# Altium PCB SF16_POWER.PcbDoc
Units mm, origin at the board's own origin, x right, y up, seen from the top; angles counter-clockwise.
Board outline 135 x 75 mm, 2 copper layers (Top Layer, Bottom Layer); 87 components, 63 nets, 272 pads, 0 vias.
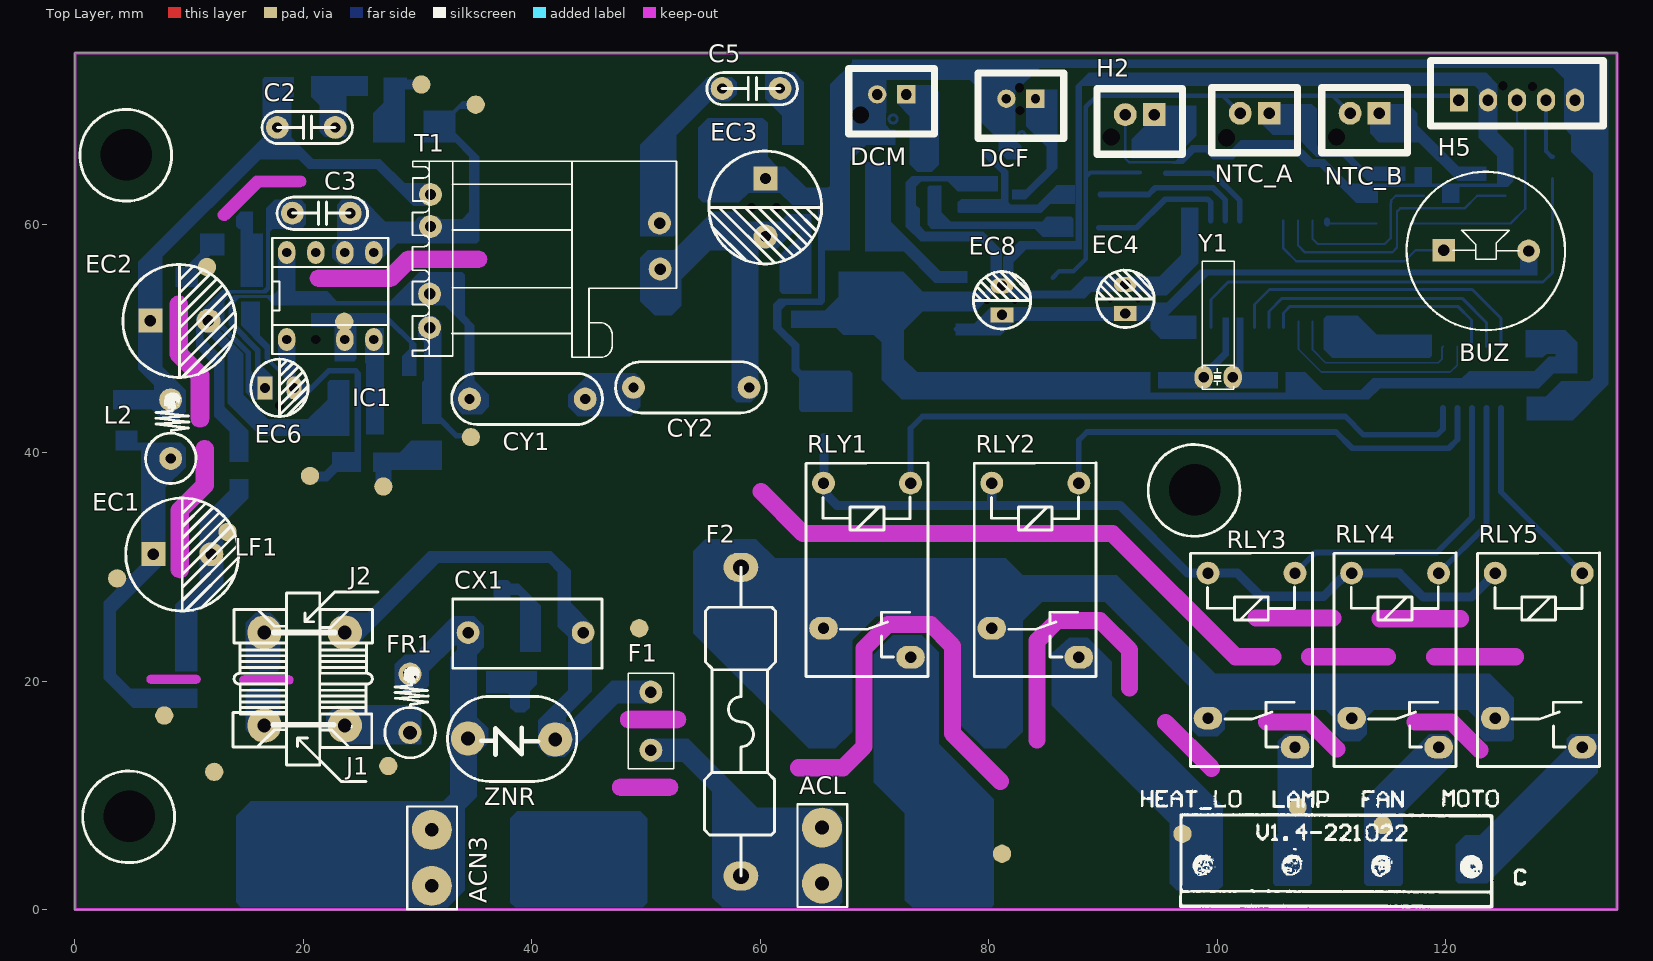
[diagram p0: Top Layer view]
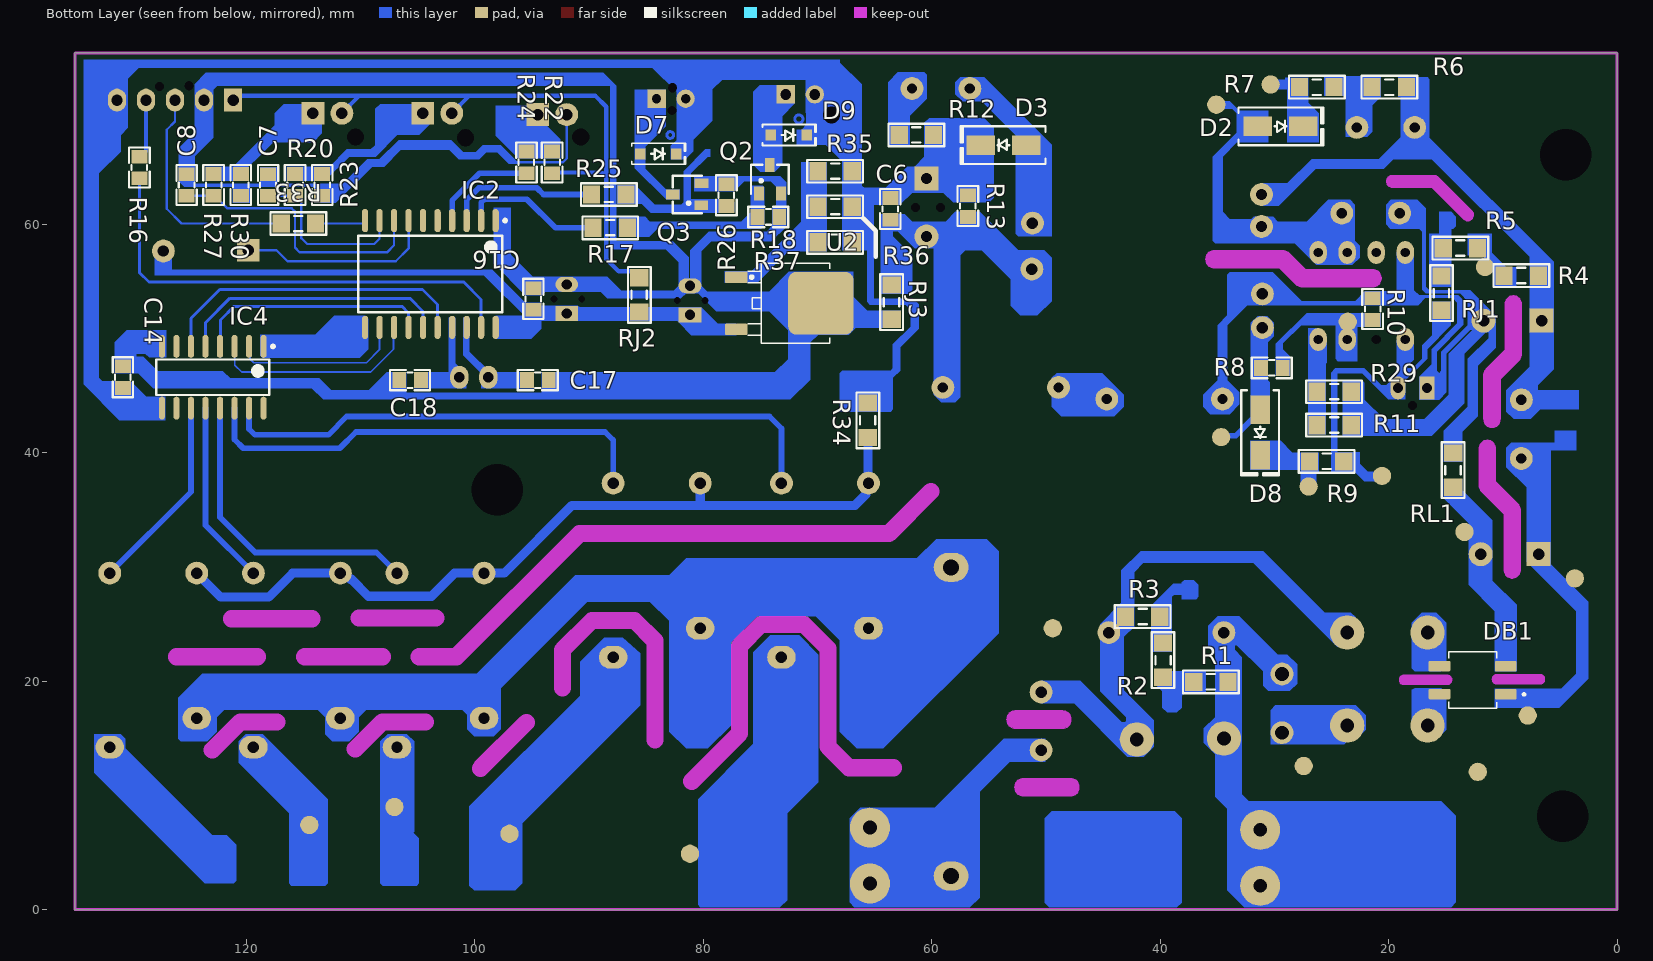
[diagram p1: Bottom Layer view, seen from below]
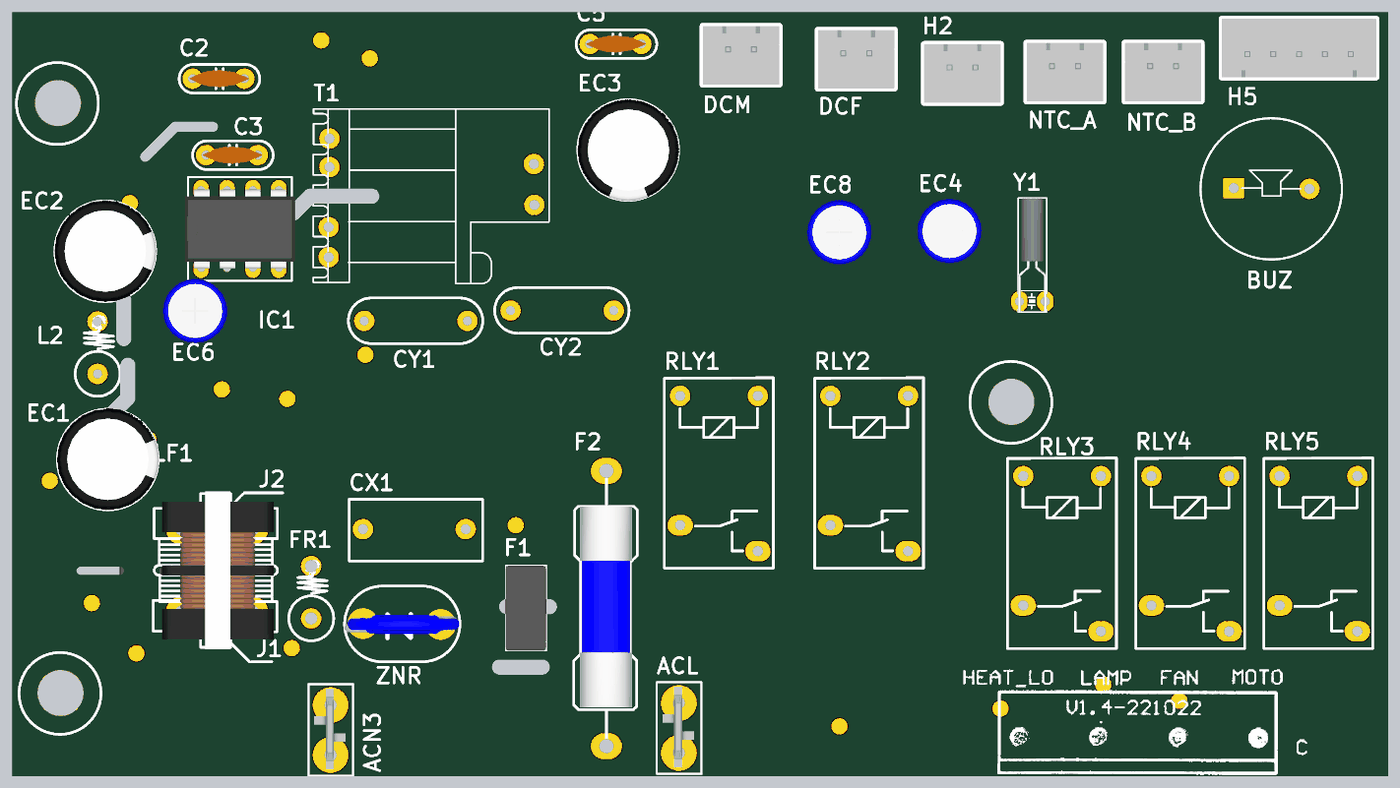
[diagram p2: 3D render of the assembled board from above, using the file's embedded part models]
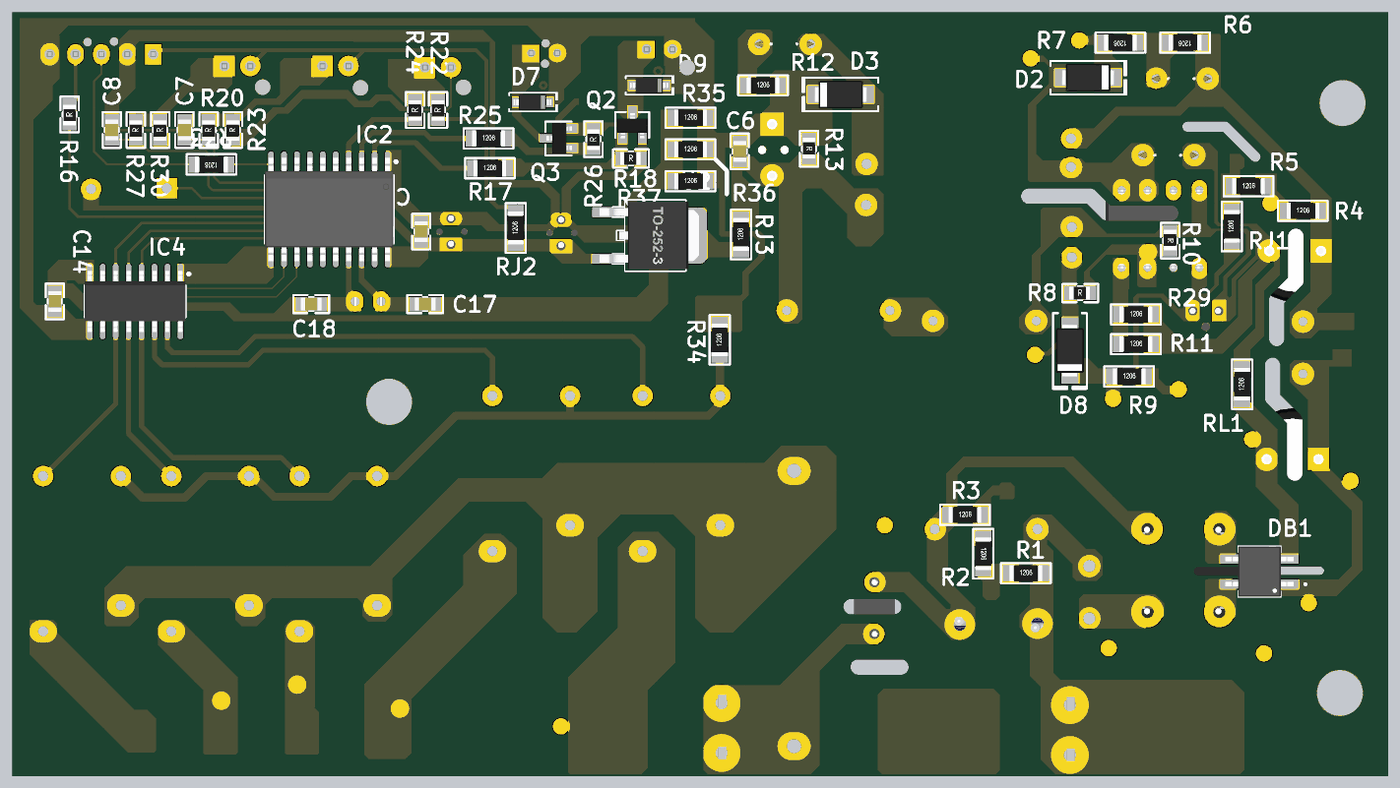
[diagram p3: 3D render of the assembled board from below, using the file's embedded part models]

## Layer stack, top to bottom
Top Solder: solder mask 0.0102, Solder Resist, Dk 3.5
Top Layer: signal copper 0.0356
Dielectric 1: dielectric 0.32, FR-4, Dk 4.8
Bottom Layer: signal copper 0.0356
Bottom Solder: solder mask 0.0102, Solder Resist, Dk 3.5

## Board outline
0,0 0,75 135,75 135,0
cut-out: 21.358,54.53 cw(c21.358,55.28) 21.358,56.031 27.272,56.031 28.713,57.471 cw(c29.243,56.941) 29.243,57.691 35.283,57.691 cw(c35.283,56.941) 36.033,56.941 cw(c35.283,56.941) 35.283,56.19 29.554,56.19 28.113,54.749 28.114,54.75 cw(c27.583,55.28) 27.583,54.53
cut-out: 8.433,29.769 8.433,34.969 cw(c9.183,34.969) 8.652,35.5 8.652,35.499 10.608,37.455 10.608,40.344 cw(c11.358,40.344) 12.108,40.344 12.108,37.144 cw(c11.358,37.144) 11.889,36.613 11.889,36.614 9.933,34.658 9.933,29.769 cw(c9.183,29.769)
cut-out: 14.833,19.718 cw(c14.833,20.118) 14.833,20.519 18.683,20.519 cw(c18.683,20.118) 19.083,20.118 cw(c18.683,20.118) 18.683,19.718
cut-out: 6.708,19.769 cw(c6.708,20.169) 6.708,20.569 10.558,20.569 cw(c10.558,20.169) 10.958,20.169 cw(c10.558,20.169) 10.558,19.769
cut-out: 10.201,46.465 8.552,48.114 8.552,48.113 cw(c9.083,48.644) 8.333,48.644 8.333,52.994 cw(c9.083,52.994) 9.833,52.994 9.833,48.955 11.482,47.306 cw(c10.952,46.775) 11.702,46.775 11.702,42.964 cw(c10.952,42.964) 10.201,42.964
cut-out: 13.4,60.452 cw(c13.046,60.806) 12.692,61.16 15.641,64.108 15.64,64.107 cw(c15.994,63.754) 15.994,64.254 19.708,64.254 cw(c19.708,63.754) 20.208,63.754 cw(c19.708,63.754) 19.708,63.253 16.201,63.253
cut-out: 47.808,9.969 cw(c47.808,10.719) 47.808,11.469 52.008,11.469 cw(c52.008,10.719) 52.758,10.719 cw(c52.008,10.719) 52.008,9.969
cut-out: 48.508,15.894 cw(c48.508,16.644) 48.508,17.394 52.708,17.394 cw(c52.708,16.644) 53.458,16.644 cw(c52.708,16.644) 52.708,15.894

## Design rules (kind name [scope] priority, off if disabled: settings)
Clearance Clearance_1 [OnLayer('Bottom Layer') vs OnLayer('Keep-Out Layer')] p1: gap=0 ignorepadtopadclearanceinfootprint=FALSE
Clearance [All] p2: gap=0.1 ignorepadtopadclearanceinfootprint=FALSE
ComponentClearance [InComponent('T2') vs InComponent('CY2')] p1: gap=0 collisioncheckmode=3 verticalgap=0 showdistances=FALSE
PolygonConnect [All] p1: connectstyle=Relief reliefconductorwidth=0.254 reliefentries=4 polygonreliefangle="90 Angle" airgapwidth=0.254
RoutingVias [All] p1: holewidth=0.711 width=1.27 viastyle="Through Hole" minholewidth=0.711 minwidth=1.27 maxholewidth=0.711 maxwidth=1.27
SolderMaskExpansion [All] p1: expansion=0.102 istentingtop=FALSE
Width [All] p1: maxlimit=0.8 minlimit=0.152 preferedwidth=0.5
29 further rules are at their usual default settings.

## Components (designator, comment, footprint, x,y, rotation, side; value= is the part's Value field where it differs from the comment)
ACL "1217861-1" CON1_P192_70D137_TH_ST 65.405,7.186 r0 top
ACN3 "1217861-1" CON1_P192_70D137_TH_ST 31.242,6.985 r0 top
BUZ "Coi Chip Speaker" "Coi 14mm" 118.429,71.408 r0 top
C2 "102/1KV" "TU GOM CAO AP" 20.347,65.363 r180 top
C3 "22/1KV" "TU GOM CAO AP" 21.664,57.857 r180 top
C5 "102/1KV" "TU GOM CAO AP" 59.291,68.763 r180 top
C6 "10pF" "tu 0805" 63.627,61.341 r90 bottom
C7 "10pF" "Tu 0805" 118.09,63.443 r270 bottom
C8 "10pF" "Tu 0805" 125.222,63.443 r270 bottom
C14 "10pF" "Tu 0805" 130.81,46.609 r90 bottom
C16 "10pF" "tu 0805" 94.869,53.467 r270 bottom
C17 "10pF" "tu 0805" 94.488,46.355 r180 bottom
C18 "10pF" "tu 0805" 105.664,46.355 r180 bottom
CX1 "0.1" "TU VUONG 10MM" 44.492,28.067 r180 top
CY1 "222M" "TU GOM CAO AP 222M" 39.544,37.329 r180 top
CY2 "222M" "TU GOM CAO AP 222M" 53.895,38.345 r180 top
D2 "M7" "DIODE SMA" 29.464,68.58 r180 bottom
D3 "SS510" "DIODE SMA" 53.721,66.929 r0 bottom
D7 "T4" "DIODE SOD-123" 83.947,66.167 r180 bottom
D8 "RS1M" "DIODE SMA" 31.242,41.783 r270 bottom
D9 "T4" "DIODE SOD-123" 72.517,67.818 r180 bottom
DB1 "MLB10S" MBLS-1 12.446,20.32 r0 bottom
DCF "Header 2P 2.54 Duc Thang" XH2.54M-2#1 84.074,70.993 r180 top
DCM "Header 2P 2.54 Duc Thang" XH2.54M-2#2 72.771,71.374 r180 top
EC1 "10UF/400V" "tu hoa 10mm" 9.398,31.115 r0 top
EC2 "10UF/400V" "tu hoa 10mm" 9.144,51.562 r0 top
EC3 "680uF/25V" "tu hoa 10mm" 60.452,61.468 r270 top
EC4 "100uF/16V" "tu hoa 5mm" 91.948,53.467 r90 top
EC6 "47uF/50V" "tu hoa 5mm" 17.907,45.677 r0 top
EC8 "100uF/16V" "tu hoa 5mm" 81.153,53.34 r90 top
F1 "2A 250VAC" "Cau chi 2A 250V T2A250V" 52.705,12.065 r90 top
F2 "3.15A/250VAC" "Cau Chi 250V" 48.597,15.425 r90 top (schematic designator F1)
FR1 "1.5R" "TRO CAU CHI DUNG" 29.337,15.494 r0 top
H2 "Header 2P 2.54 Duc Thang" XH2.54M-2#3 94.488,69.596 r180 top
H5 "Header 5P 2.54 DT" XH2.54M-5 121.159,70.872 r0 top
IC1 "MH002775" DIP8 22.352,53.721 r0 top
IC2 "74HC245 SMD" "SOP 20" 103.886,55.65 r270 bottom
IC4 "ULN2003" "SOP 16" 122.936,46.609 r270 bottom
L2 "100uH 3A" "CUON CAM - duplicate" -0.383,41.458 r0 top
LF1 "47uH SMD" "CUON CAM AC-AC" 20.066,20.193 r0 top
NTC_A "Header 2P 2.54 Duc Thang" XH2.54M-2#3 104.549,69.723 r180 top
NTC_B "Header 2P 2.54 Duc Thang" XH2.54M-2#3 114.173,69.723 r180 top
Q2 "HF" SOT-23 74.168,63.938 r180 bottom value=C9014
Q3 "HF" SOT-23 81.407,62.611 r90 bottom value=C9014
R1 "0.68R" "tro smd 1206" 35.56,19.939 r180 bottom
R2 "0.68R" "tro smd 1206" 39.751,21.844 r270 bottom
R3 "0.68R" "tro smd 1206" 41.529,25.654 r180 bottom
R4 "0.68R" "tro smd 1206" 8.382,55.499 r180 bottom
R5 "0.68R" "tro smd 1206" 13.716,57.912 r180 bottom
R6 "0.68R" "tro smd 1206" 19.939,72.009 r0 bottom
R7 "0.68R" "tro smd 1206" 26.289,72.009 r0 bottom
R8 "0.22R" "tro smd 0805" 30.226,47.498 r180 bottom
R9 "0.68R" "tro smd 1206" 25.424,39.243 r180 bottom
R10 "0.22R" "tro smd 0805" 21.336,52.578 r270 bottom
R11 "0.68R" "tro smd 1206" 24.765,42.418 r180 bottom
R12 "0.68R" "tro smd 1206" 61.341,67.818 r180 bottom
R13 "0.22R" "tro smd 0805" 56.769,61.595 r270 bottom
R16 "0.22R" "tro smd 0805" 129.426,64.966 r90 bottom
R17 "0.68R" "tro smd 1206" 88.138,59.69 r180 bottom
R18 "0.22R" "tro smd 0805" 74.295,60.706 r180 bottom
R20 "0.22R" "tro smd 0805" 115.788,63.441 r90 bottom
R22 "0.22R" "tro smd 0805" 93.285,65.417 r90 bottom
R23 "0.22R" "tro smd 0805" 113.411,63.441 r90 bottom
R24 "0.22R" "tro smd 0805" 95.54,65.417 r90 bottom
R25 "0.68R" "tro smd 1206" 88.265,62.611 r180 bottom
R26 "0.22R" "tro smd 0805" 78.039,62.541 r90 bottom
R27 "0.22R" "tro smd 0805" 122.921,63.441 r90 bottom
R29 "0.68R" "tro smd 1206" 24.765,45.339 r180 bottom
R30 "0.22R" "tro smd 0805" 120.543,63.441 r90 bottom
R33 "0.68R" "Tro SMD 1206" 115.443,60.071 r0 bottom
R34 "0.68R" "tro smd 1206" 65.59,42.842 r90 bottom
R35 "0.68R" "tro smd 1206" 68.453,64.643 r180 bottom
R36 "0.68R" "tro smd 1206" 68.453,61.531 r180 bottom
R37 "0.68R" "tro smd 1206" 68.453,58.42 r180 bottom
RJ1 "0.68R" "tro smd 1206" 15.367,53.975 r90 bottom
RJ2 "0.68R" "tro smd 1206" 85.593,53.823 r90 bottom
RJ3 "0.68R" "tro smd 1206" 63.5,53.189 r90 bottom
RL1 "0.68R" "tro smd 1206" 14.351,38.481 r90 bottom
RLY1 "Relay JZC-8F-1H" "Relay 4 chan JZC-8F" 63.992,39.068 r270 top
RLY2 "Relay JZC-8F-1H" "Relay 4 chan JZC-8F" 78.724,39.068 r270 top
RLY3 "Relay JZC-8F-1H" "Relay 4 chan JZC-8F" 97.647,31.194 r270 top
RLY4 "Relay JZC-8F-1H" "Relay 4 chan JZC-8F" 110.22,31.194 r270 top
RLY5 "Relay JZC-8F-1H" "Relay 4 chan JZC-8F" 122.793,31.194 r270 top
T1 "Bien ap" "BIEN AP EE1610-12V1.1A" 38.354,57.404 r0 top
U2 "78M05 SMD TO252" TO252 73.406,53.086 r270 bottom
Y1 "16Mhz" "Thach Anh 2 Chan 32,768 KHz" 98.806,46.609 r90 top value=4Mhz
ZNR "MOV-07D471KTR" "Tu MOV - duplicate" 32.596,11.233 r0 top value=126pF

## Footprints (in the part's own frame and the unit in brackets; to place one, negate y for a bottom-side part, rotate by r counter-clockwise, add the part's x,y. Pads: shape width x height; smd on the part's side, far side on the other; paste and mask are expansions set on the pad)
"BIEN AP EE1610-12V1.1A" [mm]
  round 2 hole 1: 1(-7.225,5.2) 2(-7.225,2.4) 3(-7.3,-3.5) 4(-7.3,-6.45) 5(12.825,2.7) 6(12.875,-1.325)
  silkscreen extent -8.81,-9.05 14.3,8.11
"Cau chi 2A 250V T2A250V" [mm]
  round 2 hole 1: 1(1.905,2.286) 2(6.985,2.286)
  silkscreen extent 0.27,0.29 8.62,4.29, body extent 0.27,0.32 8.62,4.32, height 8.1
"Cau Chi 250V" [mm] "De Fuse"
  oval 2.54x3.048 hole 1.4: 1(-12.475,-9.7) 2(14.55,-9.7)
  silkscreen extent -12.47,-12.73 14.55,-6.51, body extent -8.64,-12.2 11.06,-7.1, height 9.41
"Coi 14mm" [mm]
  rect 2x2 hole 1: 1(1.4,-13.675)
  round 2 hole 1: 2(8.825,-13.75)
  silkscreen extent -1.86,-20.68 12.01,-6.81
CON1_P192_70D137_TH_ST [mm] "SOLDER TABS"
  round 3.5 hole 1.2: 1(0,-4.9) 1(0,0)
  silkscreen extent -2.16,-6.95 2.21,2.05, body extent -1.62,-6.31 1.47,1.61, height 10.48
"CUON CAM - duplicate" [mm] "Dang cam giong tro"
  round 2 hole 0.9: 1(8.765,-1.961) 2(8.763,3.175)
  silkscreen extent 6.57,-4.16 10.98,3.81, body extent 6.87,-3.51 10.67,1.23, height 13.57
"CUON CAM AC-AC" [mm] "Cuon Cam 4.5x5"
  round 3 hole 1.2: 1(3.556,4.064) 2(-3.48,4.064) 3(3.556,-4.064) 4(-3.48,-4.064)
  silkscreen extent -6.22,-8.96 6.48,7.62, body extent -5.39,-7.75 5.61,7.75, height 16.77
"DIODE SMA" [mm] "SMA"
  rect 2.5x1.7 smd: 1(-2,0) 2(2,0)
  silkscreen extent -3.68,-1.65 3.75,1.65, body extent -2.6,-1.37 2.6,1.37, height 2.4
"DIODE SOD-123" [mm] "SOD-123"
  rect 0.9x0.95 smd: 1(-1.575,0) 2(1.575,0)
  silkscreen extent -2.3,-0.92 2.41,0.92, body extent -1.86,-0.78 1.86,0.77, height 1.35
DIP8 [mm] "W.300/L.400"
  oval 1.5x2 hole 0.8: 1(-3.81,-3.81) 3(1.27,-3.81) 4(3.81,-3.81) 5(3.81,3.81) 6(1.27,3.81) 7(-1.27,3.81) 8(-3.81,3.81)
  round 0 hole 0.8: 2(-1.27,-3.81)
  silkscreen extent -5.08,-5.08 5.08,5.08, body extent -5.4,-3.88 5.4,3.88, height 4.5
MBLS-1 [mm]
  rrect23% 1.91x0.91 smd: 1(-2.7,1.45) 2(-2.7,-1) 3(3.1,-1) 4(3.1,1.45)
  silkscreen extent -4.4,-2.26 2.3,2.7, body extent -3.15,-2.26 3.55,2.7, height 2.7
"Relay 4 chan JZC-8F" [mm]
  round 2 hole 1: 1(1.73,1.54) 2(1.73,9.16)
  oval 2x2.5 hole 1: 3(16.97,9.16) 4(14.43,1.54)
  silkscreen extent -0.05,0 18.65,10.68, body extent 0.25,0.25 18.45,10.45, height 15.5
"SOP 16" [mm] "SOIC, 16-Leads, Body 9.90x3.91mm, Pitch 1.27mm, IPC Medium Density"
  oval 2x0.55 smd: 1(-2.7,4.445) 2(-2.7,3.175) 3(-2.7,1.905) 4(-2.7,0.635) 5(-2.7,-0.635) 6(-2.7,-1.905) 7(-2.7,-3.175) 8(-2.7,-4.445) 9(2.7,-4.445) 10(2.7,-3.175) 11(2.7,-1.905) 12(2.7,-0.635) 13(2.7,0.635) 14(2.7,1.905) 15(2.7,3.175) 16(2.7,4.445)
  silkscreen extent -2.82,-4.95 1.55,5.39, body extent -3,-4.95 3,4.95, height 1.4
"SOP 20" [mm] "SOIC, 20-Leads, Body 12.60x7.50mm, Pitch 1.27mm, IPC Medium Density"
  oval 2.032x0.55 smd: 1(-4.675,5.715) 2(-4.675,4.445) 3(-4.675,3.175) 4(-4.675,1.905) 5(-4.675,0.635) 6(-4.675,-0.635) 7(-4.675,-1.905) 8(-4.675,-3.175) 9(-4.675,-4.445) 10(-4.675,-5.715) 11(4.675,-5.715) 12(4.675,-4.445) 13(4.675,-3.175) 14(4.675,-1.905) 15(4.675,-0.635) 16(4.675,0.635) 17(4.675,1.905) 18(4.675,3.175) 19(4.675,4.445) 20(4.675,5.715)
  silkscreen extent -4.8,-6.3 3.35,6.66, body extent -5.07,-6.3 5.07,6.3, height 2.25
SOT-23 [mm] "SOT 23 _ 1-3-2"
  rect 0.85x1.2 smd: 1(-0.94,-1.245) 2(0.985,-1.25) 3(0.005,1.25)
  silkscreen extent -1.65,-1.27 1.65,1.27, body extent -1.47,-1.33 1.53,1.17, height 1.06
"Thach Anh 2 Chan 32,768 KHz" [mm]
  oval 2x1.6 hole 0.9: 1(0,0) 2(0,-2.54)
  silkscreen extent -1.05,-2.68 10.15,0.11, body extent -1.05,-2.67 10.15,0.13, height 1.69
TO252 [mm] "TO252"
  round 0.5 on Mech15: 0(0,0)
  rrect25% 1x2 smd: 1(-2.285,-3.7) 3(2.285,-3.7)
  rrect25% 5.5x5.7 smd: 2(0,3.7)
  silkscreen extent -3.5,-2.7 3.5,4.5, body extent -3.3,-3.95 3.3,5.76, height 2.31
"TRO CAU CHI DUNG" [mm]
  round 2 hole 1.2: 1(0,0) 2(-0.002,5.136)
  silkscreen extent -2.2,-2.2 2.21,5.78, body extent -1.9,-1.55 1.9,3.19, height 13.57
"tro smd 0805" [mm]
  rect 1.2x1.4 smd: 1(-0.946,-0.061) 2(0.954,-0.061)
  silkscreen extent -1.75,-0.97 1.75,0.84, body extent -1.56,-0.76 1.44,0.64, height 0.53
"tro smd 1206" [mm]
  rect 1.5x1.6 smd: 1(-1.5,0) 2(1.5,0)
  silkscreen extent -2.44,-0.99 2.44,0.99, body extent -1.6,-0.8 1.6,0.8, height 0.6
"Tro SMD 1206" [mm]
  rect 1.5x1.6 smd: 1(-1.5,0) 2(1.5,0)
  silkscreen extent -2.44,-0.99 2.44,0.99, body extent -1.6,-0.8 1.6,0.8, height 0.6
"tu 0805" [mm] "Compoment SMD 80x50mil"
  rect 1.2x1.4 smd: 1(-0.946,-0.003) 2(0.954,-0.003)
  silkscreen extent -1.75,-0.89 1.75,0.89, body extent -1.01,-0.64 1.01,0.63, height 0.61
"Tu 0805" [mm] "Compoment SMD 80x50mil"
  rect 1.2x1.4 smd: 1(-0.946,-0.003) 2(0.954,-0.003)
  silkscreen extent -1.75,-0.89 1.75,0.89, body extent -1.01,-0.64 1.01,0.63, height 0.61
"TU GOM CAO AP" [mm] "TU GOM CAO AP"
  round 2 hole 0.9: 1(-2.431,-3.119) 2(2.631,-3.119)
  silkscreen extent -3.95,-4.52 3.96,-1.7, body extent -2.89,-3.97 2.95,-2.28, height 6.12
"TU GOM CAO AP 222M" [mm] "TU GOM CAO AP"
  round 2 hole 0.9: 1(-5.125,-7.375) 2(5,-7.375)
  silkscreen extent -6.63,-9.62 6.56,-5.15
"tu hoa 5mm" [mm]
  rect 1.3x2 hole 0.9: 1(-1.27,0)
  oval 1.3x2 hole 0.9: 2(1.27,0)
  silkscreen extent -2.51,-2.51 2.51,2.51, body extent -3.12,-3.18 3.23,3.18, height 11.33
"tu hoa 10mm" [mm]
  rect 2.1x2.1 hole 1: 1(-2.54,0)
  round 2.1 hole 1: 2(2.54,0)
  silkscreen extent -4.95,-4.96 4.93,4.92, body extent -5,-5 4.97,5, height 20.01
"Tu MOV - duplicate" [mm]
  round 3 hole 1.2 paste-2539.97 mask+0: 1(1.821,3.753) 2(9.445,3.662)
  silkscreen extent 0.02,0 11.33,7.44, body extent 0,2.75 11.29,4.6, height 16.5
"TU VUONG 10MM" [mm] "Tu gom mini"
  round 2 hole 1: 1(0,3.81) 2(10.075,3.81)
  silkscreen extent -1.65,0.87 11.41,6.93
XH2.54M-2#1 [mm]
  rect 1.6x1.6 hole 0.8: 1(0,0)
  round 1.6 hole 0.8: 2(2.54,0)
  silkscreen extent -2.48,-2.26 5.02,3.46, body extent -2.48,-2.26 5.02,3.48, height 6.91
XH2.54M-2#2 [mm]
  rect 1.6x1.6 hole 0.95: 1(0,0)
  round 1.6 hole 0.95: 2(2.54,0)
  silkscreen extent -2.48,-2.26 5.02,3.46, body extent -2.48,-2.26 5.02,3.48, height 6.91
XH2.54M-2#3 [mm]
  rect 2x2 hole 1: 1(0,0)
  round 2 hole 1: 2(2.54,0)
  silkscreen extent -2.48,-2.26 5.02,3.46, body extent -2.48,-2.26 5.02,3.48, height 6.91
XH2.54M-5 [mm]
  rect 1.6x2 hole 1: 1(0,0)
  oval 1.6x2 hole 1: 2(2.54,0) 3(5.08,0) 4(7.62,0) 5(10.16,0)
  silkscreen extent -2.48,-2.26 12.64,3.46, body extent -2.48,-2.26 12.64,3.48, height 6.91

## Part data
ACL ACN3: library part CON-PLG-SPADE_1X1-256-ST-TH, "1 Pins, 1 Row 256mil Pitch, Straight, Male", Alternate Part Number-1=NA, Case/Package=TH-CON, Manufacturer="TE Connectivity", Mating Part Number=2-520183-2, Manufacturer Part Number=1217861-1, Supplier Part Number-1=1217861-1, Supplier-1=ARROW
BUZ: library part "Coi 14mm", "Còi chip"
C2 C3 C5: library part "Tu gom CAO AP", "Cắm", Chung_Loai=Cắm, Don_Vi=Con, Ma_Hang=MH004767, So_Chan=2, Ten_Linh_Kien="Tụ gốm 15P 50V"
C6 C7 C8 C14 C16 C17 C18: library part "Tu 0805 10pF 50V 10%", "Dán", Chung_Loai=Dán, Don_Vi=Con, Ma_Hang=MH004554, So_Chan=2, Ten_Linh_Kien="Tụ 0805 10P 10% 50V"
CX1: library part "Tu MKP X2 0.1uF 275VAC 10MM", "Cắm", Chung_Loai=Cắm, Don_Vi=Con, Ma_Hang=MH007473, So_Chan=2, Ten_Linh_Kien="Tụ tantalum 224-0.22uF 50V DIP5.08 sứ vàng"
CY1 CY2: library part "Tu gom CAO AP 222M", "Cắm", Chung_Loai=Cắm, Don_Vi=Con, Ma_Hang=MH004767, So_Chan=2, Ten_Linh_Kien="Tụ gốm 15P 50V"
D2: library part "Diode M7 1N4007 SMD 1A 1000V", "Dán", Chung_Loai=Dán, Don_Vi=Con, Ma_Hang=MH000944, Ten_Linh_Kien="Diode M7 1N4007 SMD 1A 1000V"
D3 D8: library part "Diode SS34 ( 1N5822 )", "Dán", Chung_Loai=Dán, Don_Vi=Con, Ma_Hang=MH002104, Ten_Linh_Kien="Diode SS34 3A 40V SMA ( 1N5822 SS34A)"
D7 D9: library part "Diode S4", "Dán", Chung_Loai=Dán, Don_Vi=Con, Ma_Hang=MH005519, Ten_Linh_Kien="Diode S4 SOD123 ( 1N5819 SOD123)"
DB1: "DÁN"
DCF DCM H2 H5 NTC_A NTC_B: "Cắm", Chung_Loai=Cắm, Don_Vi=Con
  DCF DCM H2 NTC_A NTC_B: Ma_Hang=MH001283, Ten_Linh_Kien="Header 2P XH2.54-2P Đực Thẳng"
  H5: Ma_Hang=MH001298, Ten_Linh_Kien="Header 5P XH2.54-5P Đực Thẳng"
EC1 EC2: library part "Tu Hoa 1000uF 10V 10x12", "Cắm", Chung_Loai=Cắm, Don_Vi=Con, Ma_Hang=MH006614, So_Chan=2, Ten_Linh_Kien="Tụ Hóa 1000uF 10V 10x12MM"
EC3: library part "Tu Hoa 6.8uF 400V 10x17", "Cắm", Chung_Loai=Cắm, Don_Vi=Con, Ma_Hang=MH003745, So_Chan=2, Ten_Linh_Kien="Tụ Hóa 6.8uF 400V 10x17MM"
EC4 EC8: library part "Tu Hoa 330uF 10V 6x11", "Cắm", Chung_Loai=Cắm, Don_Vi=Con, Ma_Hang=MH008830, So_Chan=2, Ten_Linh_Kien="Tụ Hóa 330uF 10V 6x11MM"
EC6: library part "Tu Hoa 47uF 16V 5x10", "Cắm", Chung_Loai=Cắm, Don_Vi=Con, Ma_Hang=MH006859, So_Chan=2, Ten_Linh_Kien="Tụ Hóa 47uF 16V"
F1 F2: library part "Cau chi 2A 250V T2A250V", "Cắm", Ma_Hang=MH010033, Ten="Cầu Chì Tự Phục Hồi 2A 24V SMD1812"
FR1: library part "Tro Vach 2W", "Cắm", Chung_Loai=Cắm, Don_Vi=Con, Ma_Hang=MH006312, So_Chan=2, Ten_Linh_Kien="Trở 1% 2w 1.5R"
IC1: library part "AT24C01 DIP8 EEPROM", "Cắm", Chung_Loai=Cắm, Don_Vi=Con, Ma_Hang=MH002775, Ten_Linh_Kien="AT24C01 DIP8 EEPROM 1KBIT"
IC2 U2: "Dán", Chung_Loai=Dán, Don_Vi=Con
  IC2: Ma_Hang=MH003571, Ten_Linh_Kien="74HC245DW SSOP20 5.2MM"
  U2: Ma_Hang=MH001917, Ten_Linh_Kien="78M05 TO252"
IC4: library part "ULN2003A SMD", "Dán", Chung_Loai=Dán, Don_Vi=Con, Ma_Hang=MH002408, Ten_Linh_Kien="ULN2003 SOP16"
L2: library part "CUON CAM VACH DUNG", "Dán", Chung_Loai=Dán, Don_Vi=Con, Ma_Hang=MH002209, Ten_Linh_Kien="Cuộn Cảm 100uH 3A 8x10MM"
LF1: library part "CUON CAM AC_AC", "Dán", Chung_Loai=Dán, Don_Vi=Con, Ma_Hang=MH004211, Ten_Linh_Kien="Cuộn Cảm 47uH 7x7x4MM CD74R"
Q2 Q3: library part "C1815 SOT23 TRANS NPN 0.15A 50V", "Cắm"
R1 R2 R3 R4 R5 R6 R7 R9 R11 R12 R17 R25 R29 R33 R34 R35 R36 R37 RJ1 RJ2 RJ3 RL1: library part "Tro 1206", "Dán", Chung_Loai=Dán, Don_Vi=Con, Ma_Hang=MH008104, So_Chan=2, Ten_Linh_Kien="Trở 1206 1% 0.68R"
R8 R10 R13 R16 R18 R20 R22 R23 R24 R26 R27 R30: library part "Tro 0805", "Dán", Chung_Loai=Dán, Don_Vi=Con, Ma_Hang=MH005466, So_Chan=2, Ten_Linh_Kien="Trở 0805 1% 0.22R"
RLY1 RLY2 RLY3 RLY4 RLY5: library part "Relay 4 chan JZC-8F-1H", "Relay 4 chan HF46F", Ma_Hang=MH003879, Ten="Relay 5V5A HF46F-G 5-HS1"
Y1: library part "Thach Anh 2 chan 32,768 Khz", "Crystal For all Crystal 2pin."
ZNR: library part "Varistor 10D471K 470V", "Cam", Capacitance=126pF, Clamping Current=10A, Clamping Voltage=775V, Manufacturer="Bourns Inc.", Package=0, Temperature="-40°C to +105°C", Temperature Range High=+105°C, Temperature Range Low=-40°C, Varistor Voltage=423V, Voltage Rating Ac=300V, Voltage Rating Dc=385V, Voltage Tolerance=10%, Automotive=No, Category=Res, ComponentLink2Description=Datasheet, ComponentLink2URL=https://www.bourns.com/docs/product-datasheets/mov07d.pdf?sfvrsn=86ba81fd_26, Device Class L1="Circuit Protection", Device Class L2=Varistors, Device Class L3=unset, Digikey Description="VARISTOR 470V 1.2KA DISC 7MM", Height=11mm, Lead Free=Yes, Manufacturer Part Number=MOV-07D471KTR, Mouser Description="Varistors 105pF 470volts 10%", Octopart=https://octopart.com/mov-07d471ktr-bourns-19184728, RoHS=TRUE

## Free pads (board coordinates)
  round 1.6 all layers, no hole: 10(3.694,29.003) 10(7.817,16.994) 10(11.557,56.261) 10(12.192,12.065) 10(13.358,33.069) 10(20.574,37.973) 10(23.578,51.464) 10(27,37.044) 10(27.432,12.573) 10(30.328,72.239) 10(34.658,41.369) 10(35.083,70.469) 10(49.403,24.638) 10(81.158,4.894) 10(96.958,6.644) 10(107.033,8.994) 10(114.483,7.419)
  round 0 hole 0.8: 11(17.907,44.127) 11(59.225,61.481) 11(61.431,61.481) 11(82.675,71.95) 11(82.725,69.95) 11(125,72.125) 11(127.6,72.075)
  round 0 hole 1.5: 11(68.775,69.575) 11(90.725,67.625) 11(100.825,67.575) 11(110.425,67.65)
  round 0 hole 0.6: 11(79.832,53.34) 11(82.275,53.325) 11(90.627,53.467) 11(93.07,53.452)
  round 1.524 hole 4.5: 12(4.497,66.083) 12(4.751,8.171) 12(98.024,36.745)

## Nets (pads, with @x,y where several pads share a name; then routed paths per layer and width w, separated by ;. In a path a pad name is that pad's centre, name@x,y a point inside that pad or via, vN(x,y) a via of type N, cw(c..) or ccw(c..) an arc to the next point about the centre after c; other vN are vias at no path point)
+5: BUZ.2 C16.2 EC4.1 EC8.1 IC2.20 RJ2.1 U2.3 | length 4.6
  Bottom Layer w0.381: U2.3 79.534,50.801 80.803,52.07 EC8.1
+5_J: H5.1 NTC_A.2 NTC_B.2 R22.1 RJ2.2 | length 59.4
  Bottom Layer w0.381: RJ2.2 86.151,55.881 87.404,55.881 88.49,56.967 88.49,64.142 ; R22.1@93.224,64.53 88.878,64.53 88.49,64.142 ; NTC_A.2 100.465,71.267 ; NTC_B.2 110.089,71.267 ; H5.1 120.764,71.267 110.089,71.267 ; 88.49,64.142 88.49,70.292 89.465,71.267 100.465,71.267 ; 100.465,71.267 110.089,71.267
+12: C6.2 C14.1 D3.2 D7.2 D9.2 DCF.2 DCM.2 EC3.1 H5.5 IC4.9 pad.11@68.775,69.575 pad.11@82.675,71.95 pad.11@82.725,69.95 R12.2 R13.1 R34.2 R35.2 R36.2 R37.2
ACL: ACL.1 F1.1 F2.1
ACLO: DB1.3 LF1.2
ACNO: DB1.4 LF1.4
BUZ: BUZ.1 IC2.7 | length 17.3
  Bottom Layer w0.203: IC2.7 105.791,57.891 106.915,56.767 116.39,56.767 117.356,57.733 BUZ.1
DCF: IC2.3 R25.1 | length 13.4
  Bottom Layer w0.5: R25.1 93.984,62.611 94.565,63.192 99.64,63.192 100.711,62.121 IC2.3
DCM: IC2.2 R17.1 | length 12.5
  Bottom Layer w0.5: R17.1 92.938,59.69 95.44,62.192 99.148,62.192 99.441,61.899 IC2.2
GND: C7.1 C8.1 C14.2 C16.1 C17.2 C18.1 EC4.2 EC8.2 H2.2 H5.2 IC2.1 IC4.8 pad.11@79.832,53.34 pad.11@82.275,53.325 Q2.2 Q3.2 R18.2 R23.1 R26.2 R30.1 RJ3.1 U2.2 | length 9.2
  Bottom Layer w0.203: H2.2 91.948,65.759 92.29,65.417 96.615,65.417 97.04,65.842
NetACN3_1: ACN3.1 CX1.2 FR1.2 R1.2 ZNR.1
NetC2_1: C2.1 R6.2 R7.1
NetC2_2: C2.2 EC2.1 L2.2 R4.2 R6.1 T1.1
NetC3_1: C3.1 D2.1 IC1.5 IC1.6 pad.10@35.083,70.469 T1.2
NetC3_2: C3.2 CY1.2 EC2.2 EC6.1 IC1.8 R10.1 R11.2 R29.2 RL1.2 T1.3
NetC5_1: C5.1 R12.1
NetC5_2: C5.2 D3.1 T1.5
NetC6_1: C6.1 CY2.1 EC3.2 R13.2 RJ3.2 T1.6
NetC17_1: C17.1 IC2.18 Y1.1
NetC18_2: C18.2 IC2.17 Y1.2
NetCX1_1: CX1.1 F1.2 LF1.1 R3.1 ZNR.2
NetCY1_1: CY1.1 CY2.2
NetD2_2: D2.2 pad.10@30.328,72.239 R7.2
NetD7_1: D7.1 DCF.1 Q3.3
NetD8_1: D8.1 pad.10@34.658,41.369 R8.1 T1.4
NetD8_2: D8.2 pad.10@27,37.044 R9.1
NetD9_1: D9.1 DCM.1 Q2.3
NetDB1_1: DB1.1 EC1.1 L2.1 pad.10@3.694,29.003 pad.10@7.817,16.994
NetDB1_2: DB1.2 EC1.2 pad.10@13.358,33.069 RL1.1
NetEC6_2: EC6.2 IC1.1 pad.10@20.574,37.973 R9.2 RJ1.1
NetF2_2: F2.2 RLY1.4 RLY2.4 RLY3.4 RLY4.4 RLY5.4
NetFR1_1: FR1.1 LF1.3
NetH2_1: H2.1 R22.2 R24.2
NetH5_3: H5.3 R33.2 | length 20.4
  Bottom Layer w0.203: R33.2 125.669,60.071 126.965,61.367 126.965,68.267 126.239,68.993 H5.3
NetH5_4: H5.4 R16.2 | length 5.3
  Bottom Layer w0.381: H5.4 128.779,66.408 129.265,65.921 R16.2
NetIC1_3: IC1.3 pad.10@23.578,51.464 R8.2 R10.2
NetIC1_4: IC1.4 R11.1 R29.1
NetIC2_11: IC2.11 IC4.1
NetNTC_A_1: NTC_A.1 R20.2 R23.2
NetNTC_B_1: NTC_B.1 R27.2 R30.2
NetQ2_1: Q2.1 R17.2 R18.1
NetQ3_1: Q3.1 R25.2 R26.1
NetR1_1: R1.1 R2.2
NetR2_1: R2.1 R3.2
NetR4_1: pad.10@11.557,56.261 R4.1 R5.2
NetR5_1: R5.1 RJ1.2
NetR34_1: R34.1 RLY1.1 RLY2.1 RLY3.1 RLY4.1 RLY5.1 | length 71.9
  Bottom Layer w0.8: R34.1 65.561,41.313 65.561,37.367 RLY1.1 65.762,37.108 65.762,36.345 66.715,35.392 80.34,35.392 ; RLY2.1 80.264,35.468 80.34,35.392 ; RLY5.1 122.236,27.367 118.04,27.367 115.943,29.464 111.435,29.464 110.891,28.92 110.793,28.92 109.315,27.442 103.79,27.442 101.768,29.464 97.418,29.464 91.49,35.392 80.34,35.392
NetR35_1: R35.1 R36.1 R37.1 U2.1
NTC_A: C7.2 IC2.9 R20.1 | length 15.2
  Bottom Layer w0.203: IC2.9 108.331,58.726 108.79,58.267 114.665,58.267 115.187,58.789 115.187,61.861 115.228,61.902 115.228,62.095 115.628,62.495 R20.1 115.734,62.489 C7.2
NTC_B: C8.2 IC2.8 R27.1 | length 24.5
  Bottom Layer w0.203: IC2.8 107.061,58.171 107.69,57.542 115.315,57.542 115.74,57.967 115.74,61.117 116.015,61.392 121.657,61.392 122.76,62.495 R27.1 125.219,62.495 C8.2
O_RL1: IC4.15 RLY1.2 | length 54.5
  Bottom Layer w0.5: RLY1.2 73.152,42.129 74.19,43.167 111.215,43.167 112.815,41.567 119.24,41.567 119.761,42.088 IC4.15
O_RL2: IC4.14 RLY2.2 | length 40.9
  Bottom Layer w0.5: RLY2.2 87.884,41.111 88.59,41.817 110.39,41.817 111.815,40.392 120.265,40.392 121.031,41.158 IC4.14
O_RL3: IC4.13 RLY3.2 | length 27.1
  Bottom Layer w0.5: RLY3.2 108.61,31.267 119.215,31.267 122.301,34.353 IC4.13
O_RL4: IC4.12 RLY4.2 | length 16.2
  Bottom Layer w0.5: RLY4.2 123.571,33.655 IC4.12
O_RL5: IC4.11 RLY5.2 | length 17.4
  Bottom Layer w0.5: IC4.11 124.841,36.576 RLY5.2
RL1: IC2.12 IC4.2 | length 15.6
  Bottom Layer w0.152: IC2.12@108.347,51.517 108.347,49.008 109.471,47.884 119.336,47.884 119.685,48.233 119.685,49.233 IC4.2
RL2: IC2.13 IC4.3 | length 19.1
  Bottom Layer w0.152: IC2.13@107.109,51.508 107.109,49.056 109.095,47.07 120.406,47.07 121.012,47.675 IC4.3@121.012,49.309
RL3: IC2.14 IC4.4 | length 21.6
  Bottom Layer w0.254: IC2.14 105.791,52.227 106.381,52.817 121.053,52.817 122.258,51.612 IC4.4@122.258,48.44
RL4: IC2.15 IC4.5 | length 23.9
  Bottom Layer w0.254: IC2.15 104.521,52.373 105.665,53.517 121.44,53.517 123.571,51.386 IC4.5
RL5: IC2.16 IC4.6 | length 27.6
  Bottom Layer w0.254: IC2.16 103.251,52.978 104.565,54.292 122.315,54.292 124.841,51.766 IC4.6
RX: IC2.19 R16.1 | length 41.6
  Bottom Layer w0.254: IC2.19 99.441,53.418 100.965,54.942 128.517,54.942 129.365,55.791 R16.1
SW1: IC2.4 R24.1 | length 9.2
  Bottom Layer w0.5: R24.1 99.586,64.471 101.981,62.076 IC2.4
TX: IC2.10 R33.1 | length 4.6
  Bottom Layer w0.203: IC2.10@109.624,60.071 R33.1
  Bottom Layer w0.5: IC2.10 109.601,60.094 IC2.10@109.624,60.071
pads on no net: IC1.2 IC1.7 IC2.5 IC2.6 IC4.7 IC4.10 IC4.16 RLY1.3 RLY2.3 RLY3.3 RLY4.3 RLY5.3 U2.0
copper on no net: | length 4.2
  Bottom Layer w0.254: 71.989,69.215 ccw(c71.628,69.215) 71.989,69.215 ; 83.19,67.817 ccw(c82.89,67.817) 83.19,67.817

## Keep-outs
Keep-Out Layer:
  lines w0.254: 0,0 135,0 135,75 0,75 0,0
  lines w0.8: 6.708,20.169 10.558,20.169 ; 14.833,20.118 18.683,20.118
  lines w1: 13.046,60.806 15.994,63.754 19.708,63.754
  lines w1.5: 9.083,52.994 9.083,48.644 10.952,46.775 10.952,42.964 ; 9.183,29.769 9.183,34.969 11.358,37.144 11.358,40.344 ; 21.358,55.28 27.583,55.28 29.243,56.941 35.283,56.941 ; 47.808,10.719 52.008,10.719 ; 48.508,16.644 52.708,16.644 ; 60.058,36.619 63.758,32.919 90.833,32.919 101.608,22.144 104.858,22.144 ; 63.333,12.419 67.233,12.419 69.083,14.269 69.083,22.869 71.183,24.969 74.933,24.969 76.808,23.094 76.808,15.444 81.008,11.244 ; 84.233,14.869 84.233,23.544 86.008,25.319 89.733,25.319 92.308,22.744 92.308,19.419 ; 95.483,16.394 99.508,12.369 ; 103.408,25.519 110.133,25.519 ; 104.308,16.444 108.083,16.444 110.458,14.069 ; 108.083,22.144 114.883,22.144 ; 114.233,25.469 121.283,25.469 ; 117.333,16.444 120.508,16.444 122.983,13.969 ; 119.033,22.144 126.108,22.144

## Other copper
Bottom Layer:
  region net NetC2_2: 3.37,43.807 6.739,43.807 7.577,42.969 9.061,42.969 9.688,43.596 9.688,45.491 7.654,47.525 7.654,52.612 7.654,57.147 16.217,65.71 19.587,65.71 20.429,64.867 26.365,64.867 29.628,61.604 31.129,61.604 31.129,63.604 28.853,63.604 26.747,65.71 20.85,65.71 18.955,67.605 18.955,71.186 19.165,71.186 19.165,72.871 16.585,72.871 16.427,72.713 16.427,67.579 5.554,56.706 5.554,47.309 6.95,45.913 6.95,45.491 3.37,45.491
  region net NetCX1_1: 50.419,18.05 50.419,20.05 47.008,20.05 43.375,16.417 43.065,16.417 42.964,16.518 42.964,16.849 45.242,19.127 45.242,24.991 43.385,26.848 43.385,29.696 41.7,31.381 30.959,31.381 25.59,26.011 23.301,26.011 22.874,25.584 22.874,23.011 24.497,23.011 31.839,30.353 41.464,30.353 42.279,29.538 42.279,24.779 43.175,23.883 43.175,19.196 40.541,16.561 40.541,14.274 41.419,13.395 42.88,13.395 47.535,18.05
  region net NetD8_1: 32.054,43.133 33.487,41.7 34.264,41.7 34.333,41.769 34.658,41.444 34.658,41.369 34.568,41.279 33.276,41.279 32.012,42.543 30.392,42.543 30.392,46.188 30.572,46.367 30.572,49.67 30.054,50.188 30.054,51.368 30.64,51.954 31.468,51.954 32.054,51.368
  region net NetIC1_4: 25.412,50.161 26.162,50.911 27.015,50.911 27.015,41.618 25.515,41.618 25.515,47.777 25.412,47.88
  region net NetC3_2: 33.908,43.385 33.066,44.228 33.066,45.281 34.119,46.334 34.119,51.178 32.373,52.924 17.42,52.924 16.776,53.567 14.394,53.567 13.97,53.143 13.97,51.319 16.217,49.072 16.217,47.73 17.311,46.635 17.311,44.649 15.585,44.649 14.953,45.281 14.953,48.651 12.847,50.757 12.636,50.757 14.743,48.651 14.743,45.07 16.887,42.926 20.391,42.926 22.114,44.649 22.114,46.123 22.324,46.334 24.015,46.334 24.015,41.49 19.165,41.49 16.217,41.49 13.365,44.342 13.365,48.663 11.489,50.539 11.24,50.539 11.24,50.042 13.058,48.224 13.058,44.017 15.164,41.911 15.164,39.231 13.551,39.231 13.551,41.856 12.208,43.199 12.208,47.605 10.634,49.179 10.634,51.997 12.867,54.23 16.436,54.213 16.748,54.525 16.749,61.398 17.48,62.129 19.797,62.129 20.218,61.708 20.218,59.986 19.835,59.602 17.311,59.602 17.059,59.35 17.059,54.286 16.748,53.975 13.749,53.975 13.058,53.284 13.058,51.178 15.374,48.861 15.374,47.177 15.585,46.966 15.796,47.176 15.796,48.861 13.462,51.195 13.462,53.34 13.889,53.767 17.332,53.767 17.792,54.227 17.792,57.531 19.292,57.531 19.292,54.124 22.097,54.124 22.936,53.284 27.59,53.284 30.125,55.819 33.9,55.819 34.119,55.601 34.119,52.02 34.961,51.178 34.961,46.334 36.225,45.07 36.225,44.017 35.593,43.385
  region net NetEC6_2: 21.061,37.488 22.114,37.488 22.956,38.331 25.04,38.331 25.04,47.017 24.67,47.387 22.114,47.387 20.64,45.913 20.21,45.913 19.292,46.831 19.292,49.911 17.792,49.911 17.792,48.128 18.323,47.598 18.323,47.387 17.902,47.387 17.059,48.229 17.059,49.398 16.167,50.29 16.167,53.225 14.567,53.225 14.567,51.143 16.638,49.072 16.638,48.229 18.527,46.34 18.527,44.677 20.036,44.677 22.324,46.966 24.49,46.966 24.49,40.043 22.535,40.043 22.535,39.045 21.821,38.331 21.061,38.331
  region net +12: 68.027,43.596 68.027,46.966 67.816,47.176 63.604,47.176 63.393,47.387 63.393,49.493 61.849,51.037 61.849,52.526 62.282,52.959 65.405,52.959 65.659,53.213 65.659,57.707 67.816,57.707 67.816,65.499 69.29,66.973 71.817,66.973 71.817,68.293 71.392,68.293 70.975,68.71 70.975,69.711 71.031,69.767 71.031,72.66 78.346,72.66 79.189,71.817 79.189,69.08 80.874,67.395 80.874,66.383 81.565,65.692 82.822,65.692 82.822,66.881 82.334,67.369 82.334,71.593 84.441,73.7 129.427,73.7 130.383,72.744 130.367,72.728 130.367,68.448 130.998,67.816 130.998,66.341 130.999,66.341 132.894,64.446 132.894,46.544 132.613,46.263 130.107,46.263 128.752,44.909 127.106,44.909 127.106,42.855 131.1,42.855 134.239,45.994 134.239,74.425 68.027,74.425 68.027,74.134 66.131,72.239 66.131,63.393 65.92,63.183 64.025,63.183 62.149,65.058 61.502,65.058 60.655,65.905 60.655,68.869 60.234,69.29 55.39,69.29 54.548,68.448 54.548,62.34 54.969,61.919 58.128,61.919 58.97,62.761 61.708,62.761 62.774,61.695 65.078,61.695 65.078,53.495 61.623,53.495 61.14,53.012 61.14,50.874 62.761,49.253 62.761,47.176 63.393,46.544 63.393,43.807 63.604,43.596 65.289,43.596
  region net GND: 126.986,48.339 126.986,50.721 130.472,50.721 131.507,49.687 131.507,46.963 129.452,46.963 128.155,45.667 114.255,45.667 113.26,44.672 72.365,44.672 70.64,46.398 70.64,49.655 69.945,50.349 67.246,50.349 66.656,50.939 62.7,50.939 62.7,52.439 65.637,52.439 66.856,53.658 66.856,55.836 72.495,55.836 74.239,54.091 79.634,54.091 80.153,54.61 80.153,57.655 79.294,58.514 74.029,58.514 72.741,59.802 72.741,63.668 73.273,64.2 80.768,64.2 80.768,62.895 77.278,62.895 76.394,63.779 74.081,63.779 73.607,63.305 73.607,61.679 73.941,61.345 73.941,59.866 74.45,59.356 79.505,59.356 81.115,57.746 81.115,55.26 81.265,55.26 81.265,57.115 82.664,58.514 87.63,58.514 87.63,72.115 88.765,73.25 123.528,73.25 124.499,72.28 124.499,68.068 125.925,66.641 125.925,63.789 125.442,63.305 121.183,63.305 121.183,61.884 119.677,61.884 119.677,63.305 114.044,63.305 114.044,61.884 112.149,61.884 108.99,65.043 107.937,65.043 106.463,66.517 102.25,66.517 101.408,65.675 99.618,65.675 98.986,66.306 98.038,66.306 97.406,65.675 97.04,65.308 96.092,65.308 97.722,66.938 98.459,66.938 99.302,66.938 99.934,66.306 100.987,66.306 102.04,67.359 104.462,67.359 106.673,67.359 108.358,65.675 109.401,65.675 111.534,63.542 117.288,63.542 117.288,64.989 118.793,64.989 118.793,63.542 124.499,63.542 124.499,65.962 122.899,67.562 122.899,71.774 122.54,72.132 88.14,72.115 88.14,57.799 83.272,57.799 82.153,56.68 82.153,54.61 82.571,54.192 87.187,54.192 88.382,55.387 94.911,55.387 96.84,57.316 96.84,61.462 98.35,61.462 98.35,56.59 95.563,53.803 94.134,53.803 93.845,54.091 88.982,54.091 88.408,53.517 81.946,53.517 81.503,53.96 80.427,53.96 78.873,52.406 74.239,52.406 72.555,50.721 72.555,48.194 73.716,47.032 94.134,47.032 94.134,45.246 106.01,45.246 106.01,47.032 107.724,47.032 109.3,45.456 112.57,45.456 113.623,46.509 121.416,46.509 122.048,47.141 127.756,47.141 129.019,48.405 129.629,48.405 129.629,48.667 128.839,48.667 128.511,48.339
  region net +5: 80.153,52.72 78.734,51.301 77.106,51.301 77.106,50.301 81.034,50.301 82.153,51.42 82.153,52.72
  region net +5: 128.004,57.658 128.004,55.542 99.202,55.542 95.207,51.547 82.28,51.547 82.153,51.42 80.153,51.42 80.153,52.72 90.821,52.72 90.964,52.863 95.323,52.863 98.477,56.017 126.504,56.017 126.504,57.658
  region net NetC18_2: 102.256,51.81 102.256,47.052 105.304,47.052 105.304,45.646 100.736,45.646 100.736,46.862 101.706,47.831 101.706,51.81
  region net NetQ2_1: 75.841,63.393 74.782,63.393 74.641,63.251 74.641,59.945 74.984,59.602 84.033,59.602 84.745,58.89 87.388,58.89 87.388,60.49 87.223,60.655 85.086,60.655 84.665,60.234 76.661,60.234 75.841,61.055
  region net NetR35_1: 69.203,57.62 69.203,65.443 71.396,65.443 71.396,60.234 75.759,55.871 78.106,55.871 78.106,54.871 75.285,54.871 72.536,57.62
  region net NetD7_1: 82.057,63.041 83.257,63.041 85.072,64.856 85.072,66.777 83.274,68.575 83.274,71.793 85.972,71.793 85.972,64.906 83.257,62.191 82.057,62.191
  region net NetD9_1: 71.971,72.174 71.971,70.574 73.081,69.464 73.081,65.244 73.738,64.588 74.986,64.588 75.608,65.21 75.608,71.607 75.041,72.174
  region net NetH2_1: 96.179,65.771 98.144,67.736 98.144,70.396 93.721,70.396 93.721,68.658 92.524,67.461 92.524,65.771
  region net NetC6_1: 57.496,44.86 57.917,44.438 59.181,44.438 59.813,45.07 59.813,57.917 61.498,57.917 62.972,59.392 63.393,59.392 63.393,58.97 61.708,57.285 61.708,54.127 61.919,53.916 64.446,53.916 64.446,60.866 62.761,60.866 62.34,60.866 61.708,60.234 58.76,60.234 57.917,61.076 55.811,61.076 52.441,57.707 50.125,57.707 49.493,57.075 49.493,53.284 50.757,52.02 52.23,52.02 53.073,52.863 53.073,55.179 55.601,57.707 57.075,57.707 57.496,57.285
  region net +5: 98.171,49.959 95.075,49.959 94.166,50.868 94.166,53.113 95.574,53.113 95.631,53.056 95.631,51.991 98.057,51.991 98.171,51.991
  region net NetIC2_11: 118.783,50.309 113.966,50.309 112.284,51.991 109.601,51.991 109.326,51.716 109.326,49.052 110.061,48.317 118.613,48.317 118.783,48.487
  region net NetNTC_B_1: 123.56,65.054 123.56,63.795 121.042,63.795 117.653,67.184 114.15,67.184 113.373,67.961 113.373,70.523 115.023,70.523 116.708,70.523 117.52,69.711 117.52,68.658 121.123,65.054
  region net NetNTC_A_1: 103.749,70.523 103.749,68.923 104.854,67.818 106.776,67.818 108.674,65.92 110.991,65.92 113.116,63.795 116.459,63.795 116.459,65.054 112.699,65.054 111.201,66.552 109.089,66.552 108.712,66.929 108.712,70.095 108.284,70.523
  region net NetQ3_1: 79.399,65.92 79.399,66.552 79.821,66.552 81.716,64.657 81.716,61.919 81.927,61.708 84.243,61.708 85.946,63.411 87.515,63.411 87.515,61.811 85.399,61.811 84.583,60.995 77.375,60.995 77.293,61.076 77.293,61.919 77.569,62.195 81.084,62.195 81.084,64.446 79.61,65.92
  region net ACLO: 15.374,20.85 14.959,21.266 14.959,25.132 15.837,26.011 17.08,26.011 17.959,25.132 17.959,21.118 17.691,20.85
  region net ACNO: 15.374,19.376 14.953,18.955 14.953,15.767 15.837,14.883 17.08,14.883 17.959,15.762 17.959,19.252 17.691,19.376
  region net NetFR1_1: 30.337,14.494 30.337,17.471 29.925,17.883 22.874,17.883 21.995,17.004 21.995,15.762 22.874,14.883 23.495,14.883 23.884,14.494
  region net NetR1_1: 36.014,20.85 36.014,18.955 37.91,18.955 38.12,18.744 38.12,17.691 38.541,17.27 39.384,17.27 39.805,17.691 39.805,19.104 40.437,19.736 40.437,20.85
  region net NetACN3_1: 14.532,0.211 32.644,0.211 34.119,1.685 34.119,8.846 35.172,9.899 35.172,13.619 36.171,14.619 36.171,15.861 35.172,16.861 35.172,22.324 35.803,22.956 35.803,24.852 34.961,25.694 33.066,25.694 29.696,22.324 28.853,22.324 28.011,21.482 28.011,19.797 28.643,19.165 30.538,19.165 30.959,19.587 30.959,20.475 30.959,20.85 33.276,23.167 33.487,23.167 33.487,22.746 32.855,22.114 32.855,10.109 32.223,9.477 15.374,9.477 14.111,8.214 14.111,0.632
  region net NetF2_2: 68.027,15.585 66.56,14.119 64.227,14.119 54.126,24.22 54.126,31.381 55.179,32.434 59.602,32.434 61.287,30.749 81.505,30.749 82.98,29.275 91.193,29.275 99.828,20.64 123.838,20.64 125.944,18.534 125.944,14.953 125.733,14.743 123.417,14.743 122.574,15.585 122.574,16.849 121.942,17.48 113.729,17.48 113.307,17.059 113.097,16.849 113.097,15.374 112.465,14.743 110.991,14.743 110.148,15.585 110.148,16.849 109.516,17.48 101.092,17.48 100.671,17.059 100.671,15.796 100.039,15.164 98.354,15.164 97.722,15.796 97.722,19.376 90.14,26.958 84.665,26.958 82.98,25.273 82.983,25.27 82.983,15.588 81.505,14.111 79.61,14.111 77.558,16.163 77.558,23.394 75.258,25.694 70.133,25.694 68.027,23.588
  region: 38.11,7.987 38.11,0.616 38.531,0.195 49.694,0.195 50.115,0.616 50.115,7.987 49.483,8.619 38.742,8.619
  region net ACL: 50.038,12.97 53.161,12.97 55.811,10.32 55.811,1.053 56.654,0.211 66.763,0.211 67.184,0.632 67.184,8.003 66.251,8.936 59.722,8.936 59.392,9.267 53.688,14.97 50.038,14.97
  region net NetR2_1: 40.779,26.616 40.779,22.594 38.963,22.594 38.963,27.379 38.752,27.59 38.12,27.59 38.12,27.168 36.856,27.168 36.646,27.379 36.646,28.432 37.067,28.853 37.91,28.853 38.12,28.643 38.12,28.537 38.857,28.537
  region net NetDB1_1: 2.533,20.213 2.533,26.964 3.37,27.8 5.808,30.239 5.808,40.226 3.58,40.226 3.58,41.911 5.476,41.911 5.476,40.858 9.267,40.858 9.683,40.442 9.683,38.747 7.908,36.972 7.908,30.443 3.58,26.115 3.58,20.64 4.895,19.325 10.701,19.325 10.701,17.691 5.055,17.691
  region net NetDB1_2: 8.791,20.85 8.791,26.677 10.905,28.791 10.905,34.072 13.551,36.718 13.551,37.699 15.164,37.699 15.164,36.014 12.988,33.838 12.988,28.424 10.701,26.137 10.701,20.85
  region net NetD8_2: 32.092,41.033 32.092,38.533 27.674,38.533 27.674,37.044 26.326,37.044 26.326,38.331 26.115,38.331 26.115,40.016 28.432,40.016 29.45,41.033
  region net NetIC1_3: 29.872,46.737 29.872,49.528 27.176,52.224 20.697,52.224 20.697,51.024 22.746,51.024 22.746,48.019 24.431,48.019 24.633,48.221 24.633,51.176 27.669,51.176 29.275,49.57 29.275,49.072 28.672,48.469 28.672,46.737
  region net NetR5_1: 16.427,59.181 16.427,54.548 14.532,54.548 14.532,59.602 14.321,59.602 14.111,59.813 14.111,60.655 14.532,61.076 15.585,61.076 15.585,60.655 15.585,59.602 15.585,59.181
  region net NetR4_1: 13.058,59.181 13.058,57.285 11.824,57.285 10.741,56.202 10.741,54.548 8.846,54.548 8.846,56.232 9.688,56.232 10.952,57.496 10.952,59.181
  region net NetC2_1: 25.644,72.944 25.644,71.259 23.749,71.259 23.749,67.679 21.854,67.679 21.432,68.1 21.432,70.417 20.689,71.16 20.689,72.944 22.696,72.944
  region net NetD2_2: 28.853,71.817 28.853,67.184 26.115,67.184 26.115,69.711 27.039,70.635 27.039,72.809 29.064,72.809 29.064,72.66 30.328,72.66 30.328,71.817
  region net NetC3_1: 34.329,70.133 33.697,70.133 33.276,69.711 33.276,68.027 35.382,65.92 35.382,58.549 35.172,58.339 28.222,58.339 26.327,56.444 23.166,56.444 22.535,57.075 22.535,58.128 22.956,58.549 22.956,61.708 23.378,62.129 25.273,62.129 27.168,60.234 29.696,60.234 30.117,60.655 31.802,60.655 32.012,60.445 33.908,60.445 34.54,61.076 34.54,65.92 33.276,67.184 30.538,67.184 30.538,69.922 33.066,69.922 33.908,70.764 34.329,70.764
  region: 133.315,15.374 133.315,12.005 123.627,2.317 121.1,2.317 120.889,2.527 120.889,5.686 121.732,6.529 122.995,6.529 130.577,14.111 130.577,14.953 130.998,15.374
  region: 116.256,8.424 116.256,2.317 116.045,2.106 113.097,2.106 112.886,2.317 112.886,9.688 118.573,15.374 120.047,15.374 120.679,14.743 120.679,12.847
  region: 107.621,15.374 108.253,14.743 108.253,2.317 108.042,2.106 105.094,2.106 104.883,2.317 104.883,6.244 105.383,6.744 105.304,6.823 105.304,14.743 105.936,15.374
  region: 87.041,23.799 88.666,23.799 90.772,21.693 90.772,18.744 100.46,9.056 100.46,2.106 100.039,1.685 96.459,1.685 95.827,2.317 95.827,7.582 85.507,17.902 85.507,22.456
  region: 75.608,14.532 80.452,9.688 80.452,0.421 80.242,0.211 73.292,0.211 72.66,0.842 72.66,8.424 69.922,11.162 69.922,22.324 71.607,24.009 74.134,24.009 75.608,22.535
  region net NetCY1_1: 49.068,46.969 45.074,46.969 43.175,45.07 43.175,44.017 44.017,43.175 48.651,43.175 49.493,44.017 49.493,46.544
  region net NetC5_2: 49.493,66.973 55.39,72.871 57.481,72.871 57.917,72.435 57.917,71.396 57.285,70.764 55.601,70.764 52.652,67.816 52.652,59.181 52.441,58.97 49.493,58.97
  region net NetC5_1: 62.972,73.292 63.814,72.449 63.814,66.973 61.919,66.973 61.919,69.501 60.445,70.975 60.445,73.081 60.655,73.292
  region net NetC17_1: 100.986,51.81 100.986,48.545 99.416,46.974 99.416,45.652 94.834,45.652 94.834,47.052 98.651,47.052 100.46,48.861 100.46,51.81

## Silkscreen, mask and mechanical layers (free items; w line width, h text height)
Top Overlay:
  drawing of 50 lines, arcs and shapes, not listed
Bottom Overlay:
  lines w0.4: 64.897,57.15 64.897,59.436 66.002,60.541 66.015,60.541
Mechanical 1:
  region: 105.304,47.176 105.304,45.702 105.094,45.702 105.094,45.491 100.46,45.491 100.46,45.702 100.25,45.702 100.25,47.176 100.46,47.176 100.46,47.598 101.724,47.598 101.724,47.808 101.724,49.704 101.724,51.599 101.724,51.81 102.356,51.81 102.356,47.598 105.094,47.598 105.094,47.387 105.304,47.387
  region: 33.908,41.279 33.276,41.279 32.012,42.543 29.485,42.543 29.485,45.281 30.749,46.544 30.749,49.493 29.906,50.335 29.906,51.599 30.538,52.231 31.591,52.231 33.276,50.546 33.276,48.861 32.223,47.808 32.223,42.964 33.487,41.7 33.908,41.7
  region: 10.741,54.758 10.741,54.548 8.846,54.548 8.846,56.232 9.477,56.232 9.477,56.443 9.899,56.443 9.899,56.654 10.109,56.654 10.109,56.864 10.32,56.864 10.32,57.075 10.53,57.075 10.53,57.285 10.741,57.285 10.741,57.707 10.952,57.707 10.952,59.181 13.058,59.181 13.058,57.285 12.426,57.285 12.426,56.022 11.162,56.022 11.162,55.811 10.741,55.811 10.741,54.969
Mechanical 13:
  circle w0.2: c7.417,21.398 r0.1
  lines w0.127: 9.817,17.668 9.817,22.628 14.017,22.628 14.017,17.668 9.817,17.668

## Text inside footprints (layer, text, board x,y; h text height)
LF1: Top Overlay "J1" at 23.749,11.811 h1.52; Top Overlay "J2" at 24.003,28.448 h1.52